# Altium PCB FT2232.PcbDoc
Units mm, origin at the board's own origin, x right, y up, seen from the top; angles counter-clockwise.
Board outline 27 x 38.5 mm, 2 copper layers (Top Layer, Bottom Layer), stack 0.97 mm thick; 53 components, 72 nets, 196 pads, 50 vias.
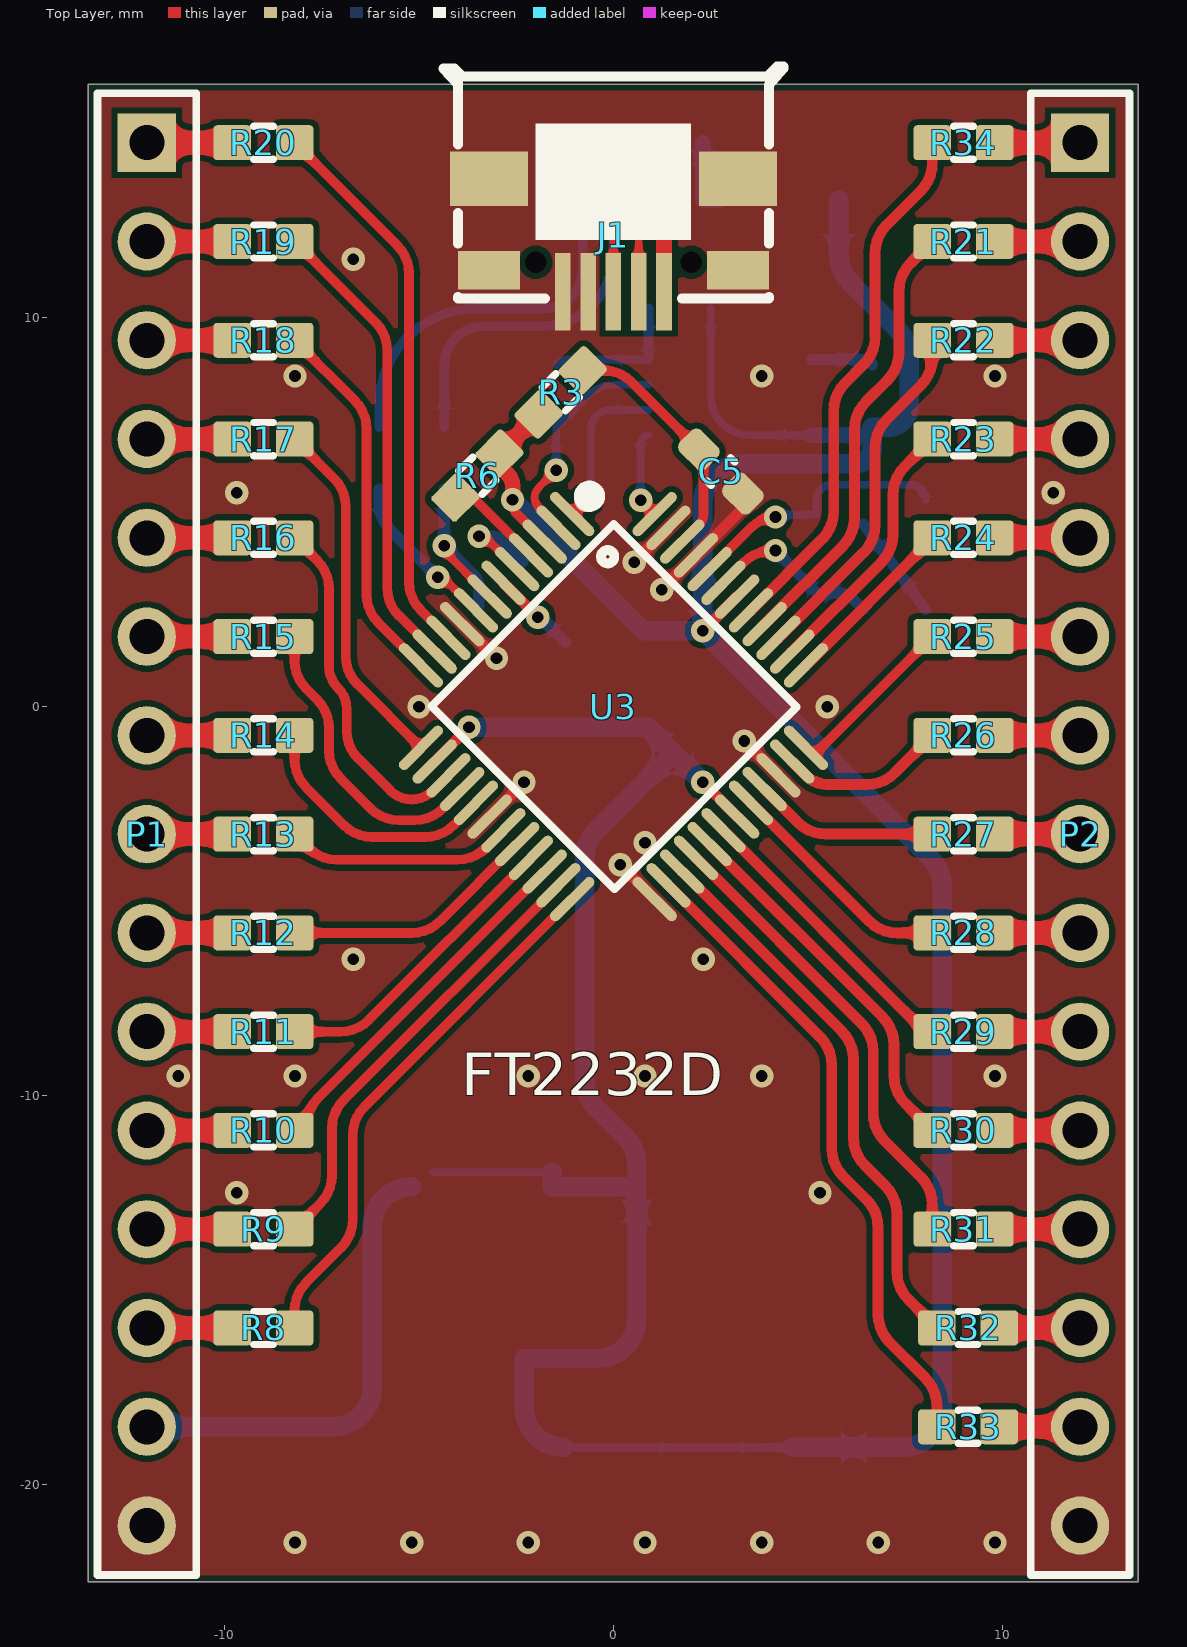
[diagram p0: Top Layer view]
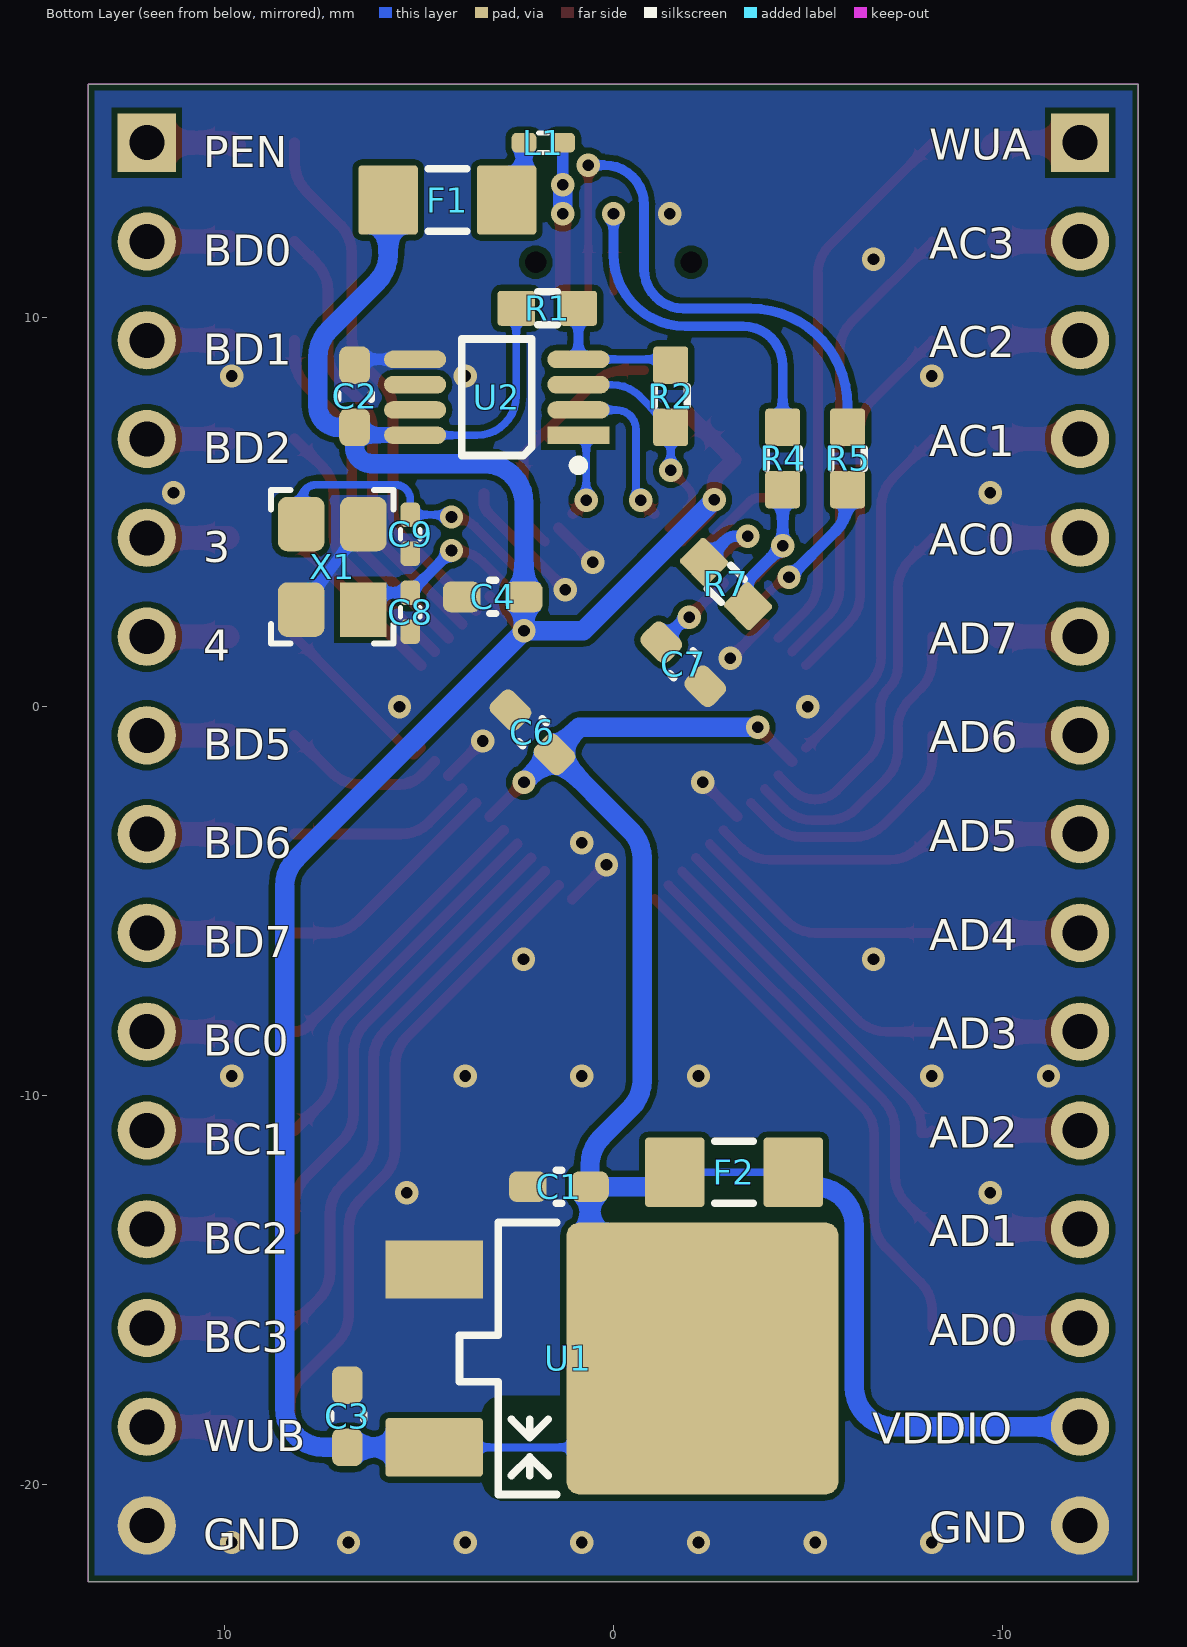
[diagram p1: Bottom Layer view, seen from below]
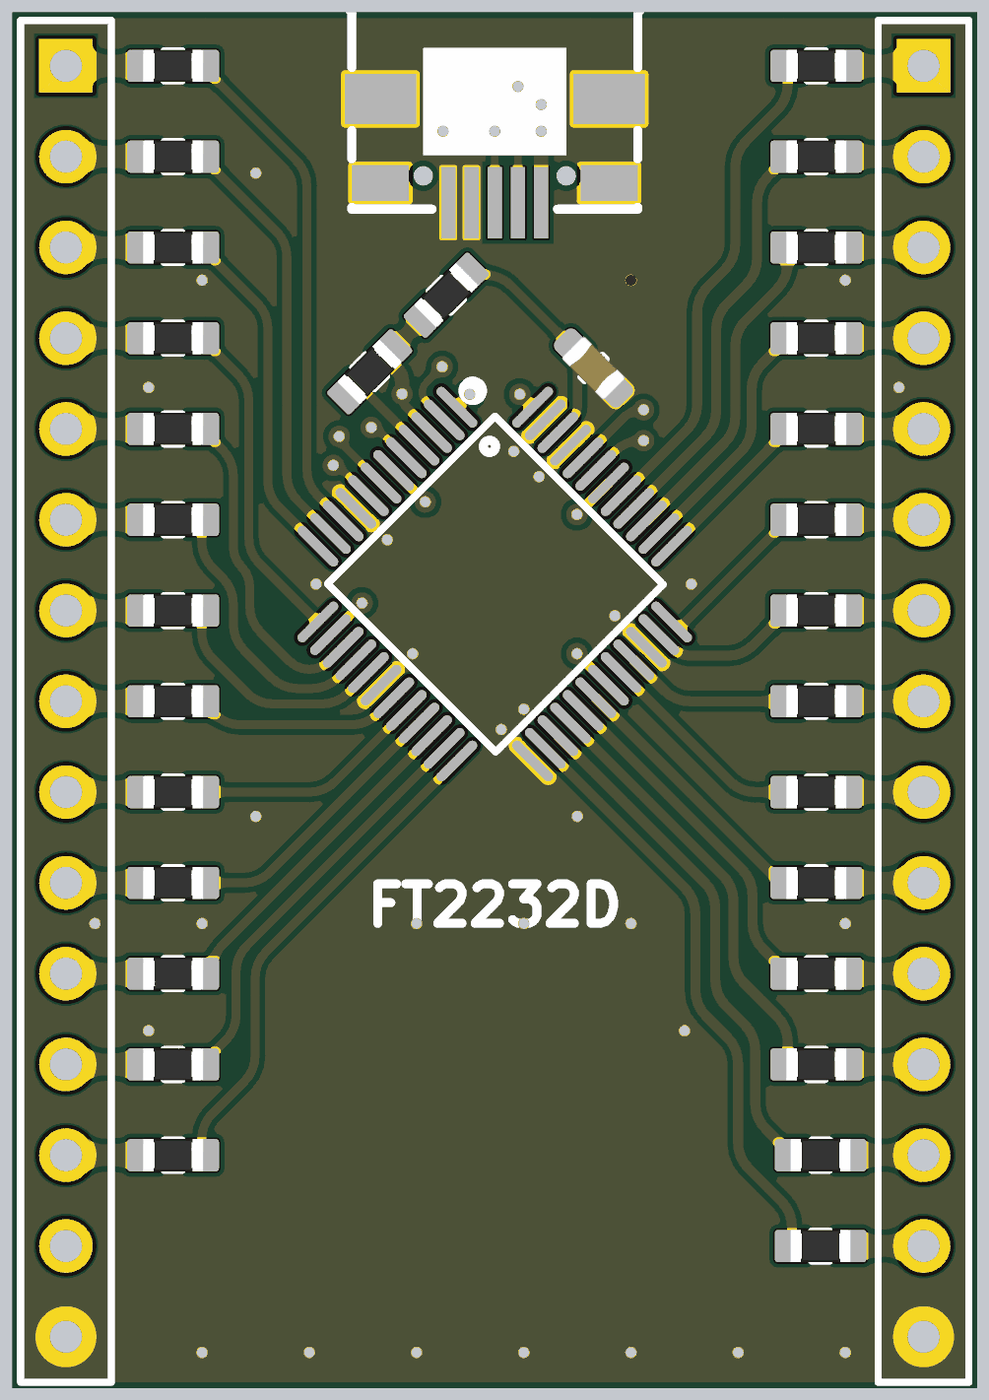
[diagram p2: 3D render of the assembled board from above, using the file's embedded part models]
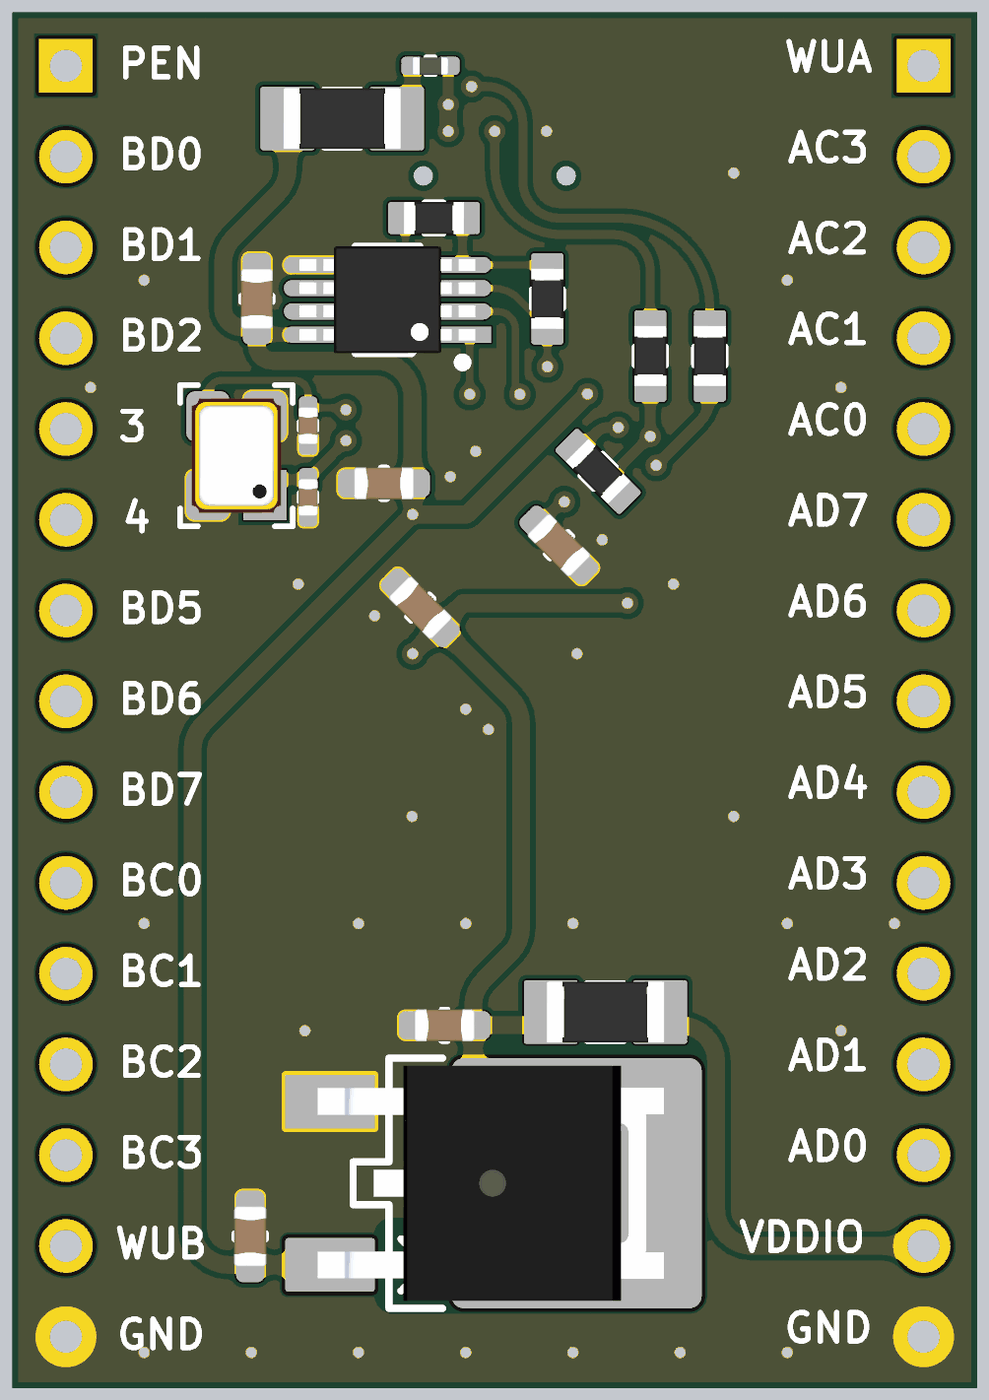
[diagram p3: 3D render of the assembled board from below, using the file's embedded part models]

## Layer stack, top to bottom
Top Solder: solder mask 0.0127, Solder Resist, Dk 3.8
Top Layer: signal copper 0.035
Dielectric: core 0.9, FR-4, Dk 4.5
Bottom Layer: signal copper 0.035
Bottom Solder: solder mask 0.0127, Solder Resist, Dk 3.8

## Board outline
-13.5,-22.5 -13.5,16 13.5,16 13.5,-22.5

## Design rules (kind name [scope] priority, off if disabled: settings)
AcuteAngle [All] p1: minimum=6.00000000000000E+0001 checktracksonly=FALSE
Clearance "Clearance all" [All] p1: gap=0.127 ignorepadtopadclearanceinfootprint=FALSE except(0.15: Arc-Fill Arc-Poly Arc-Region Track-Fill Track-Poly Track-Region SMDPad-Fill SMDPad-Poly SMDPad-Region THPad-Fill THPad-Poly THPad-Region Via-Fill Via-Poly Via-Region Fill-Fill Fill-Poly Fill-Region Poly-Poly Poly-Region Region-Region)
ComponentClearance [All] p1: gap=0.3 collisioncheckmode=3 verticalgap=0.254 showdistances=FALSE
DiffPairsRouting [All] p1: maxlimit=0.254 minlimit=0.127 mostfreqgap=0.127 toplayer_minwidth=0.127 toplayer_maxwidth=2 toplayer_prefwidth=0.127 bottomlayer_minwidth=0.127 bottomlayer_maxwidth=2 bottomlayer_prefwidth=0.127 maxuncoupledlength=1
HoleSize [All] p1: absolutevalues=TRUE maxlimit=6 minlimit=0.2 maxpercent=80.000 minpercent=20.000
HoleToHoleClearance HoleToHoleClearance_VIA [IsVia vs IsVia] p1: gap=0.254 allowstackedmicrovias=TRUE
HoleToHoleClearance HoleToHoleClearance_1 [IsVia vs IsThruPin] p2: gap=0.7 allowstackedmicrovias=TRUE
HoleToHoleClearance [All] p3: gap=0.5 allowstackedmicrovias=TRUE
MaxMinImpedance [All] p1: minimum=80.00 maximum=90.00
MinimumAnnularRing [not IsVia] p1: minimumring=0.15
ParallelSegment [All] p1: limit=254 gap=0.254
PlaneClearance [All] p1: clearance=0.45
PlaneConnect [All] p1: planeconnectstyle=Direct reliefexpansion=0.3 reliefentries=4 reliefconductorwidth=0.381 reliefairgap=0.178
PolygonConnect [All] p1: connectstyle=Direct reliefconductorwidth=0.381 reliefentries=4 polygonreliefangle="90 Angle" airgapwidth=0.356
ReturnPath [All] p1: _gaplimit=0
RoutingVias [All] p1: holewidth=0.3 width=0.6 viastyle="Through Hole" minholewidth=0.2 minwidth=0.4 maxholewidth=0.9 maxwidth=1.27
SilkToBoardRegionClearance [All] p1 off:
SolderMaskExpansion [All] p1: expansion=0.102 istentingtop=FALSE
UnRoutedNet [All] p1: checkbadconnections=TRUE
Width [All] p1: maxlimit=3.81 minlimit=0.15 preferedwidth=0.254
22 further rules are at their usual default settings.

## Components (designator, comment, footprint, x,y, rotation, side; value= is the part's Value field where it differs from the comment)
C1 "1uF" C0603 1.403,-12.345 r180 bottom
C2 "1uF" C0603 6.658,7.982 r270 bottom
C3 "1uF" C0603 6.843,-18.25 r270 bottom
C4 "1uF" C0603 3.101,2.819 r180 bottom
C5 "1uF" C0603 2.764,6.047 r135 top
C6 "1uF" C0603 2.083,-0.66 r225 bottom
C7 "1uF" C0603 -1.798,1.089 r45 bottom
C8 "18pF" C0402 5.223,2.425 r90 bottom
C9 "18pF" C0402 5.223,4.432 r90 bottom
F1 "FUSE" R1206 4.269,13.027 r0 bottom
F2 "FUSE" R1206 -3.1,-11.975 r0 bottom
J1 "MICROQTJ" MICRO-USB-SMD_MICROQTJ 0,12.122 r180 top
L1 "BEAD" L0402 1.8,14.5 r180 bottom
P1 "Header 15" HDR1X15 -12,14.5 r270 top
P2 "Header 15" HDR1X15 12,14.5 r270 top
R1 "10k" R0603 1.7,10.243 r0 bottom
R2 "2k2" R0603 -1.473,7.982 r90 bottom
R3 "470" R0603 -1.355,8.082 r45 top
R4 "22R" R0603 -4.353,6.382 r90 bottom
R5 "22R" R0603 -6.02,6.382 r90 bottom
R6 "10k" R0603 -3.499,5.939 r45 top
R7 "1k5" R0603 -2.894,3.155 r225 bottom
R8 "22R" R0603 -9,-15.98 r0 top
R9 "22R" R0603 -9,-13.44 r0 top
R10 "22R" R0603 -9,-10.9 r0 top
R11 "22R" R0603 -9,-8.36 r0 top
R12 "22R" R0603 -9,-5.82 r0 top
R13 "22R" R0603 -9,-3.28 r0 top
R14 "22R" R0603 -9,-0.74 r0 top
R15 "22R" R0603 -9,1.8 r0 top
R16 "22R" R0603 -9,4.34 r0 top
R17 "22R" R0603 -9,6.88 r0 top
R18 "22R" R0603 -9,9.42 r0 top
R19 "22R" R0603 -9,11.96 r0 top
R20 "22R" R0603 -9,14.5 r0 top
R21 "22R" R0603 9,11.96 r180 top
R22 "22R" R0603 9,9.42 r180 top
R23 "22R" R0603 9,6.88 r180 top
R24 "22R" R0603 9,4.34 r180 top
R25 "22R" R0603 9,1.8 r180 top
R26 "22R" R0603 9,-0.74 r180 top
R27 "22R" R0603 9,-3.28 r180 top
R28 "22R" R0603 9,-5.82 r180 top
R29 "22R" R0603 9,-8.36 r180 top
R30 "22R" R0603 9,-10.9 r180 top
R31 "22R" R0603 9,-13.44 r180 top
R32 "22R" R0603 9.119,-15.98 r180 top
R33 "22R" R0603 9.119,-18.52 r180 top
R34 "22R" R0603 9,14.5 r180 top
U1 "LDO" "TO-252AA (DPAK)" -2.29,-16.764 r0 bottom
U2 "96C46" MSOP8 3,7.954 r90 bottom
U3 "FT2232D-REEL" LQFP-48_L7.0-W7.0-P0.50-LS9.0-BL 0,0 r225 top
X1 "6MHZ" CRYSTAL_3.2x2.5mm 7.23,3.594 r90 bottom

## Footprints (in the part's own frame and the unit in brackets; to place one, negate y for a bottom-side part, rotate by r counter-clockwise, add the part's x,y. Pads: shape width x height; smd on the part's side, far side on the other; paste and mask are expansions set on the pad)
C0402 [mm] "Chip Capacitor Body"
  rrect50% 0.635x0.508 smd mask+0.05: 1(-0.5,0) 2(0.5,0)
  silkscreen extent -0.13,-0.25 0.13,0.25, body extent -0.52,-0.28 0.53,0.28, height 0.55
C0603 [mil] "Chip Capacitor"
  rrect50% 38x31 smd mask+1.97: 1(-31.5,0) 2(31.5,0)
  silkscreen extent -3,-17 3,17, body extent -33,-18 33,18, height 35
CRYSTAL_3.2x2.5mm [mm]
  rect 1.4x1.2 smd mask+0.05: 1(-1.1,-0.8)
  rrect40% 1.4x1.2 smd mask+0.05: 2(-1.1,0.8) 3(1.1,0.8) 4(1.1,-0.8)
  silkscreen extent -1.97,-1.57 1.97,1.57, body extent -1.6,-1.25 1.6,1.25, height 0.82
HDR1X15 [mm] "Connector; Header; 15 Position"
  rect 1.5x1.5 hole 0.9: 1(0,0)
  round 1.5 hole 0.9: 2(2.54,0) 3(5.08,0) 4(7.62,0) 5(10.16,0) 6(12.7,0) 7(15.24,0) 8(17.78,0) 9(20.32,0) 10(22.86,0) 11(25.4,0) 12(27.94,0) 13(30.48,0) 14(33.02,0) 15(35.56,0)
  silkscreen extent -1.27,-1.27 36.83,1.27
L0402 [mm] "Chip Inductor"
  rrect50% 0.635x0.508 smd mask+0.05: 1(-0.5,0) 2(0.5,0)
  silkscreen extent -0.13,-0.25 0.13,0.25, body extent -0.5,-0.25 0.5,0.25, height 0.5
LQFP-48_L7.0-W7.0-P0.50-LS9.0-BL [mm]
  oval 0.27x1.5 smd: 1(-2.75,-4.25) 2(-2.25,-4.25) 3(-1.75,-4.25) 4(-1.25,-4.25) 5(-0.75,-4.25) 6(-0.25,-4.25) 7(0.25,-4.25) 8(0.75,-4.25) 9(1.25,-4.25) 10(1.75,-4.25) 11(2.25,-4.25) 12(2.75,-4.25) 25(2.75,4.25) 26(2.25,4.25) 27(1.75,4.25) 28(1.25,4.25) 29(0.75,4.25) 30(0.25,4.25) 31(-0.25,4.25) 32(-0.75,4.25) 33(-1.25,4.25) 34(-1.75,4.25) 35(-2.25,4.25) 36(-2.75,4.25)
  oval 1.5x0.27 smd: 13(4.25,-2.75) 14(4.25,-2.25) 15(4.25,-1.75) 16(4.25,-1.25) 17(4.25,-0.75) 18(4.25,-0.25) 19(4.25,0.25) 20(4.25,0.75) 21(4.25,1.25) 22(4.25,1.75) 23(4.25,2.25) 24(4.25,2.75) 37(-4.25,2.75) 38(-4.25,2.25) 39(-4.25,1.75) 40(-4.25,1.25) 41(-4.25,0.75) 42(-4.25,0.25) 43(-4.25,-0.25) 44(-4.25,-0.75) 45(-4.25,-1.25) 46(-4.25,-1.75) 47(-4.25,-2.25) 48(-4.25,-2.75)
  silkscreen extent -3.59,-4.46 3.3,3.34
MICRO-USB-SMD_MICROQTJ [mm]
  rect 0.4x2 smd mask+0.05: 1(-1.3,1.452) 2(-0.65,1.452) 3(0,1.452) 4(0.65,1.452) 5(1.3,1.452)
  rect 1.6x1 smd: 6(-3.2,0.902) 9(3.2,0.902)
  rect 2x1.4 smd: 7(-3.2,-1.452) 8(3.2,-1.452)
  round 0 hole 0.55 unplated: ""(-2,0.698) ""(2,0.698)
  silkscreen extent -4.37,-4.34 4.38,1.63
MSOP8 [mm] "MSOP, 8-Leads"
  rect 0.45x1.6 smd mask+0.05: 1(-0.975,-2.1)
  oval 0.45x1.6 smd mask+0.05: 2(-0.325,-2.1) 3(0.325,-2.1) 4(0.975,-2.1) 5(0.975,2.1) 6(0.325,2.1) 7(-0.325,2.1) 8(-0.975,2.1)
  silkscreen extent -1.87,-2.23 1.5,0.9, body extent -1.5,-2.46 1.5,2.46, height 1.1
R0603 [mil] "Chip Resistor; Body 1.6 x 0.8 mm (LxW typ)"
  rrect20% 38x35.43 smd mask+1.97: 1(-31.5,0) 2(31.5,0)
  silkscreen extent -10,-17 10,17, body extent -33,-18 33,18, height 22
R1206 [mil] "Chip Resistor; Body 1.6 x 0.8 mm (LxW typ)"
  rrect10% 60x70 smd mask+1.97: 1(-60,0) 2(60,0)
  silkscreen extent -20,-31 20,31, body extent -65,-33 65,33, height 26
"TO-252AA (DPAK)" [mm] "D-PAK"
  rect 2.5x1.5 smd: 1(6.9,-2.286)
  rrect10% 7x7 smd: 2(0,0)
  rrect10% 2.5x1.5 smd: 3(6.9,2.286)
  silkscreen extent 3.75,-3.5 6.25,3.5, body extent -2.45,-3.29 7.25,3.29, height 2.3

## Part data
C1 C2 C3 C4 C5 C6 C7: library part CAP, "1uF 25V X7R 0603", LCSC part number=C59302, P/N=0603B105K250NT
C8 C9: library part CAP, "18pF 50V 0402", LCSC part number=C33149, P/N=GRM1555C1H180JA01D
F1 F2 R2 R3: library part RES, P/N=RC0603FR-0710KL
J1: BOM_JLCPCB Part Class="Extended Part", BOM_Manufacturer="SHOU HAN", BOM_Manufacturer Part=MicroQTJ, BOM_Supplier=LCSC, BOM_Supplier Part=C404968, Contributor=LCSC, spicePre=U, spiceSymbolName=MICROQTJ
L1: library part BLM18AG601SN1D, "INDUCTOR FERRITE BEAD 200mA 1 650mΩ 0402", LCSC part number=C92615, P/N=CBG100505U600T
P1 P2: "Header, 15-Pin", LatestRevisionDate=17-Jul-2002, LatestRevisionNote="Re-released for DXP Platform.", Publisher="Altium Limited"
R1 R6 R7: library part RES, "10k 0603", P/N=RC0603FR-0710KL
R4 R5 R8 R9 R10 R11 R12 R13 R14 R15 R16 R17 R18 R19 R20 R21 R22 R23 R24 R25 R26 R27 R28 R29 R30 R31 R32 R33 R34: library part RES, "22R 5% 0603", P/N=RC0603FR-0722RL
U1: library part NCP51460SN33T1G
U2: library part Component_2
U3: BOM_JLCPCB Part Class="Extended Part", BOM_Manufacturer=FTDI(飞特帝亚), BOM_Manufacturer Part=FT2232D-REEL, BOM_Supplier=LCSC, BOM_Supplier Part=C428116, Contributor=LCSC, spicePre=U, spiceSymbolName=FT2232D-REEL
X1: library part "CRYSTAL 12MHZ 3.20mm x 2.50mm", "CRYSTAL 6MHZ 10PF SMD", LCSC part number=C70565, P/N=X322512MOB4SI

## Via types
v1: diameter 0.6, hole 0.3, Top Layer to Bottom Layer, tented both sides, 50 vias

## Nets (pads, with @x,y where several pads share a name; then routed paths per layer and width w, separated by ;. In a path a pad name is that pad's centre, name@x,y a point inside that pad or via, vN(x,y) a via of type N, cw(c..) or ccw(c..) an arc to the next point about the centre after c; other vN are vias at no path point)
AC0: P1.5 R16.1 | length 2.1
  Top Layer w0.6: P1.5 R16.1@-9.919,4.34
AC1: P1.4 R17.1 | length 2.1
  Top Layer w0.6: P1.4 R17.1@-9.919,6.88
AC2: P1.3 R18.1 | length 2.1
  Top Layer w0.6: P1.3 R18.1@-9.919,9.42
AC3: P1.2 R19.1 | length 2.1
  Top Layer w0.6: P1.2 R19.1@-9.919,11.96
AD0: P1.13 R8.1 | length 2.1
  Top Layer w0.6: P1.13 R8.1@-9.919,-15.98
AD1: P1.12 R9.1 | length 2.1
  Top Layer w0.6: P1.12 R9.1@-9.919,-13.44
AD2: P1.11 R10.1 | length 2.1
  Top Layer w0.6: P1.11 R10.1@-9.919,-10.9
AD3: P1.10 R11.1 | length 2.1
  Top Layer w0.6: P1.10 R11.1@-9.919,-8.36
AD4: P1.9 R12.1 | length 2.1
  Top Layer w0.6: P1.9 R12.1@-9.919,-5.82
AD5: P1.8 R13.1 | length 2.1
  Top Layer w0.6: P1.8 R13.1@-9.919,-3.28
AD6: P1.7 R14.1 | length 2.1
  Top Layer w0.6: P1.7 R14.1@-9.919,-0.74
AD7: P1.6 R15.1 | length 2.1
  Top Layer w0.6: P1.6 R15.1@-9.919,1.8
BC0: P2.10 R29.1 | length 2.1
  Top Layer w0.6: R29.1@9.919,-8.36 P2.10
BC1: P2.11 R30.1 | length 2.1
  Top Layer w0.6: R30.1@9.919,-10.9 P2.11
BC2: P2.12 R31.1 | length 2.1
  Top Layer w0.6: R31.1@9.919,-13.44 P2.12
BC3: P2.13 R32.1 | length 2.1
  Top Layer w0.6: R32.1 P2.13
BD0: P2.2 R21.1 | length 2.1
  Top Layer w0.6: R21.1@9.919,11.96 P2.2
BD1: P2.3 R22.1 | length 2.1
  Top Layer w0.6: R22.1@9.919,9.42 P2.3
BD2: P2.4 R23.1 | length 2.1
  Top Layer w0.6: R23.1@9.919,6.88 P2.4
BD3: P2.5 R24.1 | length 2.1
  Top Layer w0.6: R24.1@9.919,4.34 P2.5
BD4: P2.6 R25.1 | length 2.1
  Top Layer w0.6: R25.1@9.919,1.8 P2.6
BD5: P2.7 R26.1 | length 2.1
  Top Layer w0.6: R26.1@9.919,-0.74 P2.7
BD6: P2.8 R27.1 | length 2.1
  Top Layer w0.6: R27.1@9.919,-3.28 P2.8
BD7: P2.9 R28.1 | length 2.1
  Top Layer w0.6: R28.1@9.919,-5.82 P2.9
GND: C1.1 C2.1 C3.1 C4.1 C5.1 C6.1 C7.1 C8.1 C9.1 J1.4 J1.5 J1.6 J1.7 J1.8 J1.9 P1.15 P2.15 U1.1 U2.5 U3.9 U3.18 U3.25 U3.34 U3.45 U3.47 X1.2 X1.4 | length 13.9
  Top Layer w0.28: U3.9 v1(-3.008,1.24) ; U3.18 v1(-2.301,-1.947) ; v1(0.179,-4.068) U3.25 ; v1(0.533,3.715) U3.47 ; v1(1.24,3.008) U3.45 3.218,4.986 ccw(c2.949,5.255) C5.1@3.33,5.255 ; C5.1@3.33,5.255 C5.1 ; v1(3.361,-0.886) U3.34
  Bottom Layer w0.28: U2.5 6.511,8.929 cw(c6.511,8.782) C2.1 ; X1.4 X1.2
  other v1: -8.188,-21.499 -5.188,-21.499 -2.188,-21.499 0.812,-21.499 3.812,-21.499 6.812,-21.499 9.812,-21.499 -9.688,-12.499 5.312,-12.499 -11.188,-9.499 -8.188,-9.499 -2.188,-9.499 0.812,-9.499 3.812,-9.499 9.812,-9.499 -6.688,-6.499 2.312,-6.499 0.812,-3.499 -5,0 5.5,0 -9.688,5.501 11.312,5.501 -8.188,8.501 3.812,8.501 9.812,8.501 -6.688,11.501 -1.448,12.67
NetC5_2: C5.2 R3.2 U3.46 | length 6.3
  Top Layer w0.25: R3.2 -0.259,8.648 cw(c-0.259,7.632) 0.46,8.351 C5.2 ; U3.46 2.203,4.678 ccw(c1.934,4.948) 2.315,4.947 C5.2@2.315,6.496
NetC7_2: C7.2 U3.6 | length 2.2
  Top Layer w0.28: U3.6 v1(-1.947,2.3)
  Bottom Layer w0.3: v1(-1.947,2.3) cw(c-1.947,2.133) -1.828,2.251 C7.2
NetC8_2: C8.2 U3.43 X1.1 | length 4.5
  Top Layer w0.25: U3.43 3.362,3.716 cw(c4.081,2.997) 4.081,4.013 v1(4.166,4.013)
  Bottom Layer w0.28: v1(4.166,4.013) C8.2 5.84,2.925 cw(c5.84,2.544) 6.11,2.814 X1.1
NetC9_2: C9.2 U3.44 X1.3 | length 6.9
  Top Layer w0.25: U3.44 3.569,4.63 cw(c4.166,4.033) v1(4.166,4.877)
  Bottom Layer w0.2: v1(4.166,4.877) cw(c4.299,4.744) 4.299,4.932 C9.2 5.223,5.321 cw(c5.604,5.321) 5.604,5.702 7.649,5.702 cw(c7.649,5.321) X1.3@8.03,5.321
NetF1_1: F1.1 L1.1 | length 1.9
  Bottom Layer w0.4: L1.1 2.3,13.027 F1.1
NetJ1_1: J1.1 L1.2 | length 4.6
  Top Layer w0.4: J1.1 v1(1.3,12.67) v1(1.3,13.416)
  Bottom Layer w0.3: v1(1.3,13.416) L1.2
  Bottom Layer w0.5: v1(1.3,12.67) v1(1.3,13.416)
NetR1_1: R1.1 R2.2 U2.4 | length 3.7
  Bottom Layer w0.2: R2.2 cw(c-1.12,8.429) -1.12,8.929 U2.4
  Bottom Layer w0.25: U2.4 R1.1
NetR2_1: R2.1 U2.3 U3.2 | length 5.8
  Top Layer w0.2: v1(-1.473,6.081) -1.917,5.637 ccw(c-1.647,5.368) -1.917,5.098 U3.2
  Bottom Layer w0.2: v1(-1.473,6.081) R2.1 -0.674,7.981 cw(c0.044,7.263) 0.044,8.279 U2.3
NetR4_1: R4.1 R7.2 U3.7 | length 5.2
  Top Layer w0.2: v1@-4.466,4.112 v1@-4.419,4.066 ; v1(-4.353,4.133) -4.353,4 U3.7
  Bottom Layer w0.3: R4.1 v1(-4.353,4.133) -3.571,3.351 cw(c-3.84,3.082) -3.459,3.082 R7.2
NetR5_1: R5.1 U3.8 | length 4
  Top Layer w0.2: v1@-4.319,3.269 -4.319,3.258 U3.8
  Bottom Layer w0.3: R5.1 -6.02,5.247 ccw(c-5.004,5.247) -5.722,4.528 v1(-4.517,3.322)
NetR6_1: R6.1 U3.4 | length 2.5
  Top Layer w0.25: R6.1 -3.764,5.373 cw(c-3.764,4.992) -3.494,5.262 U3.4
NetR7_1: R7.1 U3.5 | length 2.5
  Top Layer w0.2: v1@-3.258,4.329 -3.258,4.319 U3.5
  Bottom Layer w0.3: v1(-3.456,4.383) -3.148,4.383 cw(c-3.148,4.002) -2.879,4.272 R7.1
NetR8_2: R8.2 U3.24 | length 13.9
  Top Layer w0.25: R8.2 -8.2,-15.53 cw(c-7.184,-15.53) -7.902,-14.811 -7.003,-13.912 ccw(c-7.722,-13.194) -6.706,-13.194 -6.706,-11.015 cw(c-5.69,-11.015) -6.408,-10.297 U3.24
NetR9_2: R9.2 U3.23 | length 11.6
  Top Layer w0.25: R9.2 -7.537,-12.777 ccw(c-8.255,-12.058) -7.239,-12.058 -7.239,-10.842 cw(c-6.223,-10.842) -6.941,-10.123 U3.23
NetR10_2: R10.2 U3.22 | length 9.5
  Top Layer w0.25: R10.2 ccw(c-8.021,-10.721) -8.021,-10.974 -7.92,-10.974 -7.92,-10.815 cw(c-6.904,-10.815) -7.622,-10.097 U3.22
NetR11_2: R11.2 U3.21 | length 7.9
  Top Layer w0.25: R11.2 -7.013,-8.36 ccw(c-7.013,-7.344) -6.295,-8.062 U3.21
NetR12_2: R12.2 U3.20 | length 6.6
  Top Layer w0.25: R12.2 -5.18,-5.82 ccw(c-5.18,-4.804) -4.462,-5.522 U3.20
NetR13_2: R13.2 U3.19 | length 5.9
  Top Layer w0.25: R13.2 -7.84,-3.639 ccw(c-7.122,-2.921) -7.122,-3.937 -4.004,-3.937 ccw(c-4.004,-2.921) U3.19@-3.287,-3.64 ; U3.19@-3.286,-3.639 U3.19
NetR14_2: R14.2 U3.17 | length 6.6
  Top Layer w0.25: R14.2 -8.2,-1.361 ccw(c-7.184,-1.361) -7.902,-2.08 -6.927,-3.055 ccw(c-6.209,-2.337) -6.209,-3.353 -4.834,-3.353 ccw(c-4.834,-2.337) -4.117,-3.056 ; -4.116,-3.055 U3.17
NetR15_2: R15.2 U3.16 | length 7.8
  Top Layer w0.25: R15.2 -8.2,1.179 ccw(c-7.184,1.179) -7.902,0.46 -7.613,0.171 cw(c-8.331,-0.548) -7.315,-0.548 -7.315,-1.129 ccw(c-6.299,-1.129) -7.018,-1.848 -6.242,-2.623 ccw(c-5.524,-1.905) -5.524,-2.921 -5.11,-2.921 ccw(c-5.11,-1.905) U3.16@-4.392,-2.624 ; U3.16@-4.391,-2.623 U3.16
NetR16_2: R16.2 U3.15 | length 9.1
  Top Layer w0.25: R16.2 -7.613,3.753 cw(c-8.331,3.034) -7.315,3.034 -7.315,1.034 ccw(c-6.535,1.034) -7.087,0.483 cw(c-7.638,-0.069) -6.858,-0.069 -6.858,-0.621 ccw(c-5.842,-0.621) -6.56,-1.339 -5.737,-2.162 ccw(c-5.192,-1.617) -5.192,-2.388 ccw(c-5.192,-1.594) -4.63,-2.155 U3.15
NetR17_2: R17.2 U3.13 | length 9.2
  Top Layer w0.25: R17.2 -7.181,5.861 cw(c-7.899,5.143) -6.883,5.143 -6.883,1.294 ccw(c-5.867,1.294) -6.586,0.575 U3.13
NetR18_2: R18.2 U3.12 | length 9.6
  Top Layer w0.25: R18.2 -6.648,7.868 cw(c-7.366,7.149) -6.35,7.149 -6.35,2.882 ccw(c-5.334,2.882) -6.053,2.164 ; -6.052,2.163 U3.12
NetR19_2: R19.2 U3.11 | length 12
  Top Layer w0.25: R19.2 -6.114,9.874 cw(c-6.833,9.156) -5.817,9.156 -5.817,3.056 ccw(c-4.801,3.056) -5.52,2.338 ; -5.519,2.337 U3.11
NetR20_2: R20.2 U3.10 | length 14.3
  Top Layer w0.25: R20.2 -5.555,11.855 cw(c-6.274,11.137) -5.258,11.137 -5.258,3.204 ccw(c-4.242,3.204) -4.96,2.485 U3.10
NetR21_2: R21.2 U3.40 | length 11.4
  Top Layer w0.28: U3.40 5.9,4.132 ccw(c5.182,4.851) 6.198,4.851 6.198,7.123 cw(c7.214,7.123) 6.495,7.841 7.043,8.389 ccw(c6.325,9.108) 7.341,9.108 7.341,10.68 cw(c8.357,10.68) 7.638,11.398 R21.2
NetR22_2: R22.2 U3.39 | length 9.2
  Top Layer w0.28: U3.39 6.433,3.958 ccw(c5.715,4.677) 6.731,4.677 6.731,6.666 cw(c7.747,6.666) 7.029,7.384 7.902,8.258 ccw(c7.184,8.976) 8.2,8.976 R22.2
NetR23_2: R23.2 U3.38 | length 6.9
  Top Layer w0.28: U3.38 6.891,3.709 ccw(c6.172,4.427) 7.188,4.427 7.188,5.447 cw(c8.204,5.447) 7.486,6.166 R23.2
NetR24_2: R24.2 U3.37 | length 4.6
  Top Layer w0.28: U3.37 8.179,4.29 ccw(c8.129,4.34) R24.2
NetR25_2: R25.2 U3.36 | length 4.6
  Top Layer w0.25: U3.36 5.131,-1.241 5.159,-1.241 R25.2
NetR26_2: R26.2 U3.35 | length 4.3
  Top Layer w0.28: U3.35 4.978,-1.796 ccw(c5.486,-1.287) 5.486,-2.007 6.512,-2.007 ccw(c6.512,-0.991) 7.231,-1.709 R26.2
NetR27_2: R27.2 U3.33 | length 4.7
  Top Layer w0.28: U3.33 4.75,-2.982 ccw(c5.468,-2.264) 5.468,-3.28 R27.2
NetR28_2: R28.2 U3.32 | length 6
  Top Layer w0.28: U3.32 6.583,-5.522 ccw(c7.302,-4.804) 7.302,-5.82 R28.2
NetR29_2: R29.2 U3.30 | length 7.5
  Top Layer w0.28: U3.30 7.87,-8.223 ccw(c8.2,-7.894) R29.2
NetR30_2: R30.2 U3.29 | length 9.6
  Top Layer w0.28: U3.29 6.916,-7.977 cw(c6.198,-8.695) 7.214,-8.695 7.214,-9.493 ccw(c8.23,-9.493) 7.511,-10.211 R30.2
NetR31_2: R31.2 U3.28 | length 11.9
  Top Layer w0.28: U3.28 6.383,-8.15 cw(c5.664,-8.869) 6.68,-8.869 6.68,-10.45 ccw(c7.696,-10.45) 6.978,-11.169 7.902,-12.093 cw(c7.184,-12.812) 8.2,-12.812 R31.2
NetR32_2: R32.2 U3.27 | length 14.3
  Top Layer w0.28: U3.27 5.875,-8.35 cw(c5.156,-9.068) 6.172,-9.068 6.172,-11.085 ccw(c7.188,-11.085) 6.47,-11.804 6.992,-12.326 cw(c6.274,-13.045) 7.29,-13.045 7.29,-14.53 ccw(c8.306,-14.53) 7.587,-15.249 R32.2
NetR33_2: R33.2 U3.26 | length 16.6
  Top Layer w0.28: U3.26 5.316,-8.498 cw(c4.597,-9.216) 5.613,-9.216 5.613,-11.365 ccw(c6.629,-11.365) 5.911,-12.083 6.51,-12.682 cw(c5.791,-13.4) 6.807,-13.4 6.807,-15.632 ccw(c7.823,-15.632) 7.105,-16.351 8.021,-17.267 cw(c7.303,-17.986) 8.319,-17.986 R33.2
NetR34_2: R34.2 U3.41 | length 13.7
  Top Layer w0.28: U3.41 5.367,4.306 ccw(c4.648,5.024) 5.664,5.024 5.664,7.606 cw(c6.68,7.606) 5.962,8.324 6.433,8.796 ccw(c5.715,9.514) 6.731,9.514 6.731,11.67 cw(c7.747,11.67) 7.029,12.388 7.902,13.262 ccw(c7.184,13.98) 8.2,13.98 R34.2
NetU2_1: U2.1 U3.48 | length 2.3
  Top Layer w0.2: U3.48@1.044,4.967 1.077,4.967 U3.48
  Top Layer w0.28: v1(0.701,5.309) U3.48@1.044,4.967
  Bottom Layer w0.2: v1(0.701,5.309) 0.701,6.78 cw(c0.9,6.78) U2.1
NetU2_2: U2.2 U3.1 | length 4.2
  Top Layer w0.2: U3.1 -1.044,4.933 U3.1@-1.044,4.966
  Top Layer w0.28: U3.1@-1.044,4.966 v1(-0.701,5.309)
  Bottom Layer w0.2: v1(-0.701,5.309) ccw(c-0.991,5.598) -0.581,5.598 -0.581,7.119 cw(c-0.071,7.119) -0.071,7.629 U2.2
PEN: P2.1 R34.1 | length 2.3
  Top Layer w0.6: R34.1@9.75,14.43 cw(c9.919,14.261) 9.919,14.5 P2.1
USB_HOST_DM: J1.2 R5.2 | length 14.7
  Top Layer w0.2: J1.2 v1(0.65,13.924)
  Bottom Layer w0.25: R5.2 -6.02,7.745 cw(c-3.529,7.745) -3.529,10.236 -1.803,10.236 ccw(c-1.803,11.252) -0.787,11.252 -0.787,12.908 cw(c0.229,12.908) 0.229,13.924 v1(0.65,13.924)
USB_HOST_DP: J1.3 R4.2 | length 10.6
  Top Layer w0.2: J1.3 v1(0,12.67)
  Bottom Layer w0.25: R4.2 -4.353,8.763 cw(c-3.337,8.763) -3.337,9.779 -1.853,9.779 ccw(c-1.853,11.632) 0,11.632 v1(0,12.67)
VBUS: C1.2 C2.2 C3.2 C4.2 C6.2 F1.2 F2.1 F2.2 P1.14 R1.2 R3.1 R6.2 U1.2 U1.3 U2.8 U3.3 U3.14 U3.31 U3.42 | length 116.7
  Top Layer w0.25: v1(-2.595,5.321) -2.595,5.228 ccw(c-2.214,5.228) -2.484,4.959 ; -2.483,4.958 U3.3
  Top Layer w0.28: U3.14 v1(-3.715,-0.533) ; v1(2.3,-1.947) U3.31 ; v1(2.301,1.947) U3.42
  Top Layer w0.4: R6.2@-3.09,6.348 -2.707,5.965 ; R6.2 R3.1 ; -2.706,5.965 cw(c-2.976,5.696) -2.595,5.696 ; v1(-2.595,5.321) -2.595,5.696
  Bottom Layer w0.2: F2.1 F2.2 ; U1.2@-1.274,-19.05 U1.3 ; R1.2 2.5,7.995 ccw(c3.516,7.995) 3.516,6.979 U2.8
  Bottom Layer w0.4: U2.8 6.454,6.979 ccw(c6.454,7.182) C2.2
  Bottom Layer w0.5: P1.14 -7.214,-18.52 ccw(c-7.214,-17.504) -6.198,-17.504 -6.198,-13.361 cw(c-5.182,-13.361) F2.1@-5.182,-12.345 ; v1(-3.715,-0.533) 0.886,-0.533 v1(2.3,-1.947) ; v1(-2.595,5.321) 0.779,1.947 v1(2.301,1.947) ; F2.2 -1.576,-12.345 C1.2 ; U1.2@-1.274,-19.05 cw(c-1.274,-18.034) -2.29,-18.034 U1.2 -0.413,-16.764 ccw(c-0.413,-15.748) 0.603,-15.748 C1.2 ; C6.2 -0.439,-3.182 ccw(c0.279,-3.901) -0.737,-3.901 -0.737,-9.612 ccw(c0.279,-9.612) -0.439,-10.331 0.306,-11.075 cw(c-0.413,-11.794) 0.603,-11.794 C1.2 ; U1.3 7.442,-19.05 ccw(c7.442,-18.034) 8.458,-18.034 8.458,-4.631 ccw(c7.442,-4.631) 8.161,-3.913 v1(2.301,1.947) ; F1.2 5.793,11.628 ccw(c6.809,11.628) 6.091,10.909 7.306,9.694 cw(c6.588,8.975) 7.604,8.975 7.604,7.722 cw(c7.064,7.722) 7.064,7.182 C2.2 6.658,6.683 cw(c6.223,6.683) 6.223,6.248 3.317,6.248 ccw(c3.317,5.232) 2.301,5.232 C4.2 v1(2.301,1.947)
WUA: P1.1 R20.1 | length 2.3
  Top Layer w0.6: P1.1 -9.919,14.5 cw(c-9.919,14.261) R20.1@-9.75,14.43
WUB: P2.14 R33.1 | length 2.1
  Top Layer w0.6: R33.1 P2.14
pads on no net: J1. U2.6 U2.7

## Polygon pours and split planes (outlines as drawn)
GND on Top Layer "NONET_L02_P-001" (solid, remove dead copper, pour order 0): -13.5,16 -13.5,-22.5 13.5,-22.5 13.5,16
GND on Bottom Layer "NONET_L02_P-001" (solid, remove dead copper, pour order 1): 13.5,16 13.5,-22.5 -13.5,-22.5 -13.5,16

## Keep-outs
Keep-Out Layer:
  the board outline again, w0

## Other copper
Bottom Layer:
  pour cut-out: -4.624,-11.086 -1.576,-11.086 -1.576,-12.864 -4.624,-12.864
  pour cut-out: 0.335,-20.423 2.788,-20.423 ccw(c2.788,-19.824) 3.387,-19.824 3.387,-18.247 ccw(c2.869,-18.247) 2.869,-17.728 0.347,-17.728 0.347,-20.264

## Silkscreen, mask and mechanical layers (free items; w line width, h text height)
Top Overlay:
  rectangle: -2,12 2,15
  text "FT2232D" at -3.915,-10 h1.1
Bottom Overlay:
  lines w0.2: 1.675,-19.775 2.15,-19.3 ; 1.675,-18.325 2.15,-18.8 ; 2.15,-19.775 2.15,-19.3 ; 2.15,-18.325 2.15,-18.8 ; 2.625,-19.775 2.15,-19.3 ; 2.625,-18.325 2.15,-18.8
  text "WUA" at -8.123,14.06 h0.8
  text "PEN" at 10.552,13.875 h0.8
  text "AC3" at -8.123,11.52 h0.8
  text "BD0" at 10.552,11.335 h0.8
  text "AC2" at -8.123,8.98 h0.8
  text "BD1" at 10.552,8.795 h0.8
  text "AC1" at -8.123,6.44 h0.8
  text "BD2" at 10.552,6.255 h0.8
  text "AC0" at -8.123,3.9 h0.8
  text "3" at 10.552,3.715 h0.8
  text "AD7" at -8.123,1.36 h0.8
  text "4" at 10.552,1.175 h0.8
  text "AD6" at -8.123,-1.18 h0.8
  text "BD5" at 10.552,-1.365 h0.8
  text "AD5" at -8.123,-3.72 h0.8
  text "BD6" at 10.552,-3.905 h0.8
  text "AD4" at -8.123,-6.26 h0.8
  text "BD7" at 10.552,-6.445 h0.8
  text "AD3" at -8.123,-8.8 h0.8
  text "BC0" at 10.552,-8.985 h0.8
  text "AD2" at -8.123,-11.34 h0.8
  text "BC1" at 10.552,-11.525 h0.8
  text "AD1" at -8.123,-13.88 h0.8
  text "BC2" at 10.552,-14.065 h0.8
  text "AD0" at -8.123,-16.42 h0.8
  text "BC3" at 10.552,-16.605 h0.8
  text "VDDIO" at -6.657,-18.96 h0.8
  text "WUB" at 10.552,-19.145 h0.8
  text "GND" at -8.123,-21.5 h0.8
  text "GND" at 10.552,-21.685 h0.8